# Altium PCB Keypad PCB.PcbDoc
Units mm, origin at the board's own origin, x right, y up, seen from the top; angles counter-clockwise.
Board outline 46.36 x 59 mm, 2 copper layers (Top Layer, Bottom Layer), stack 1.671 mm thick; 9 components, 67 nets, 63 pads, 25 vias.
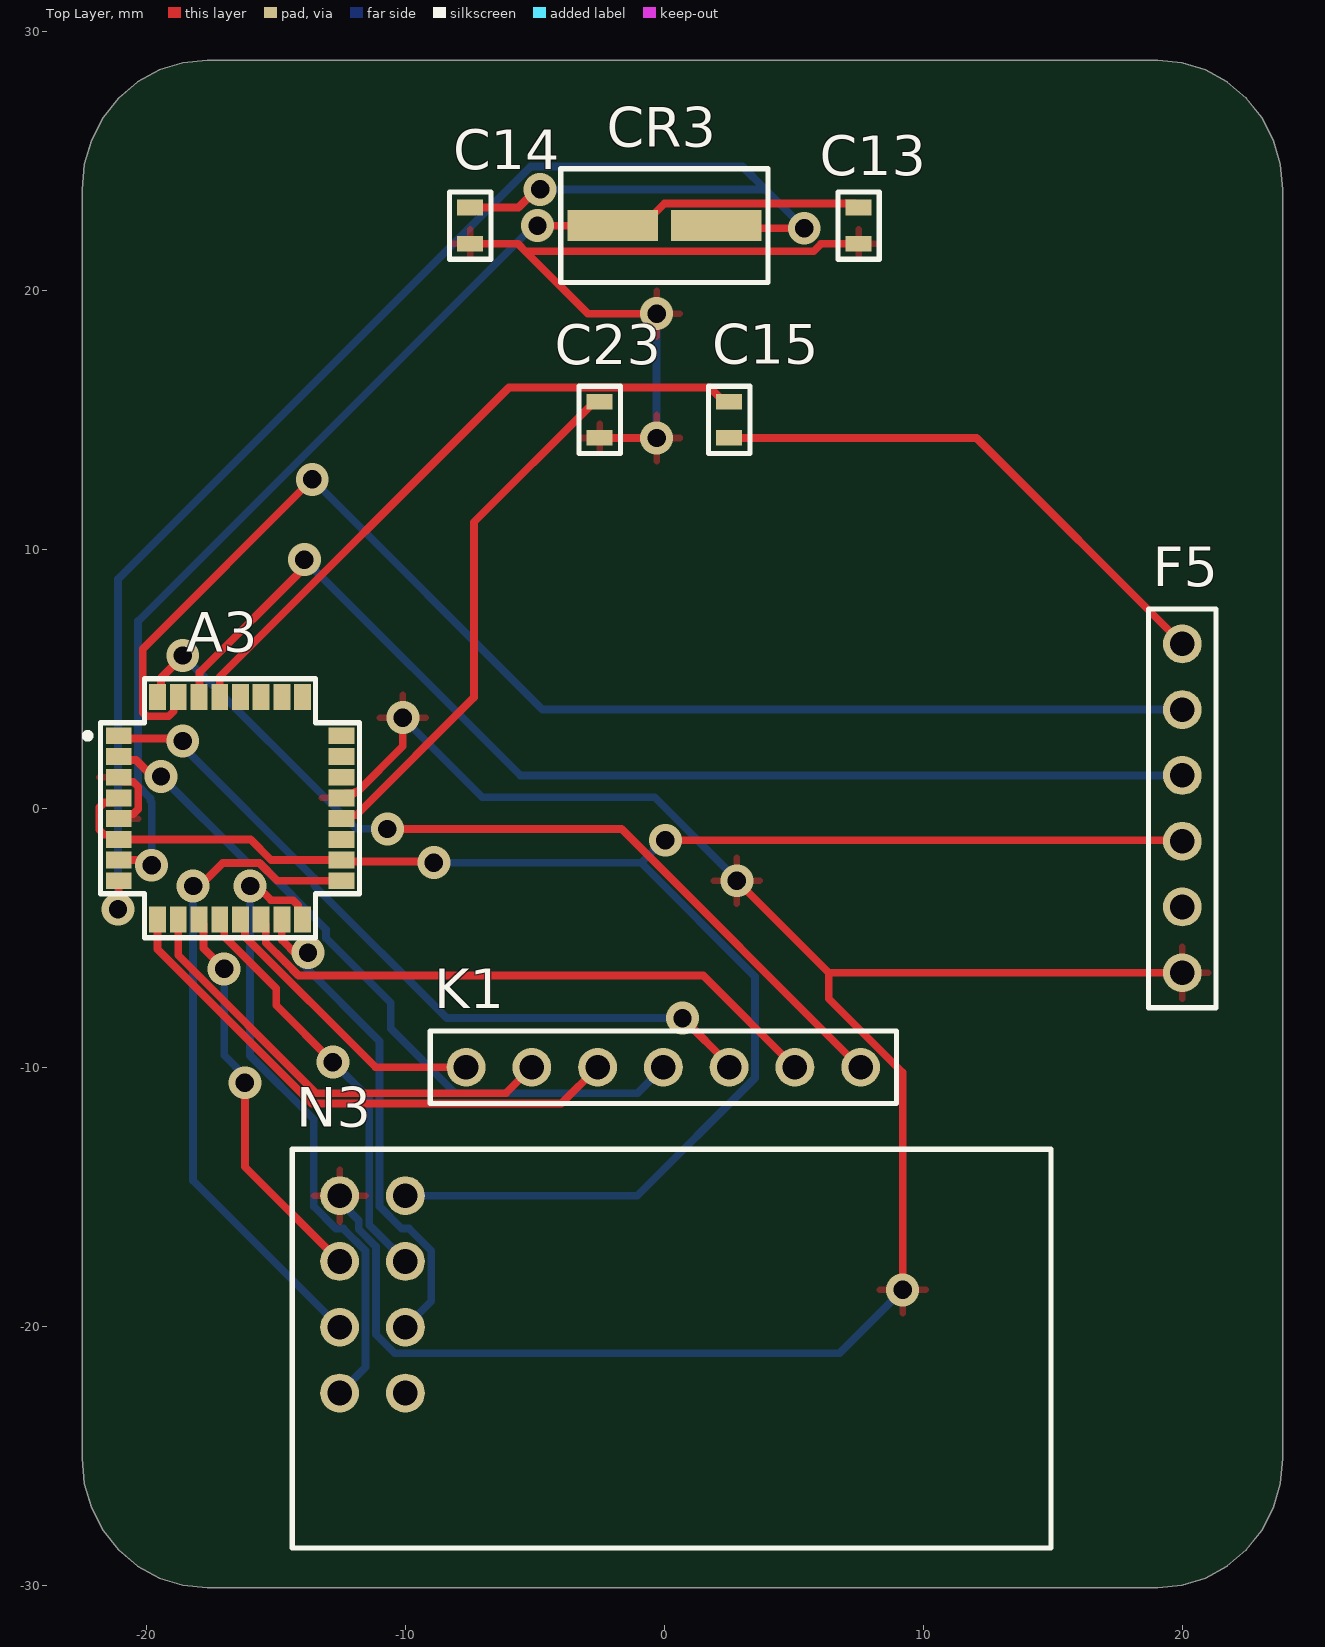
[diagram p0: Top Layer view]
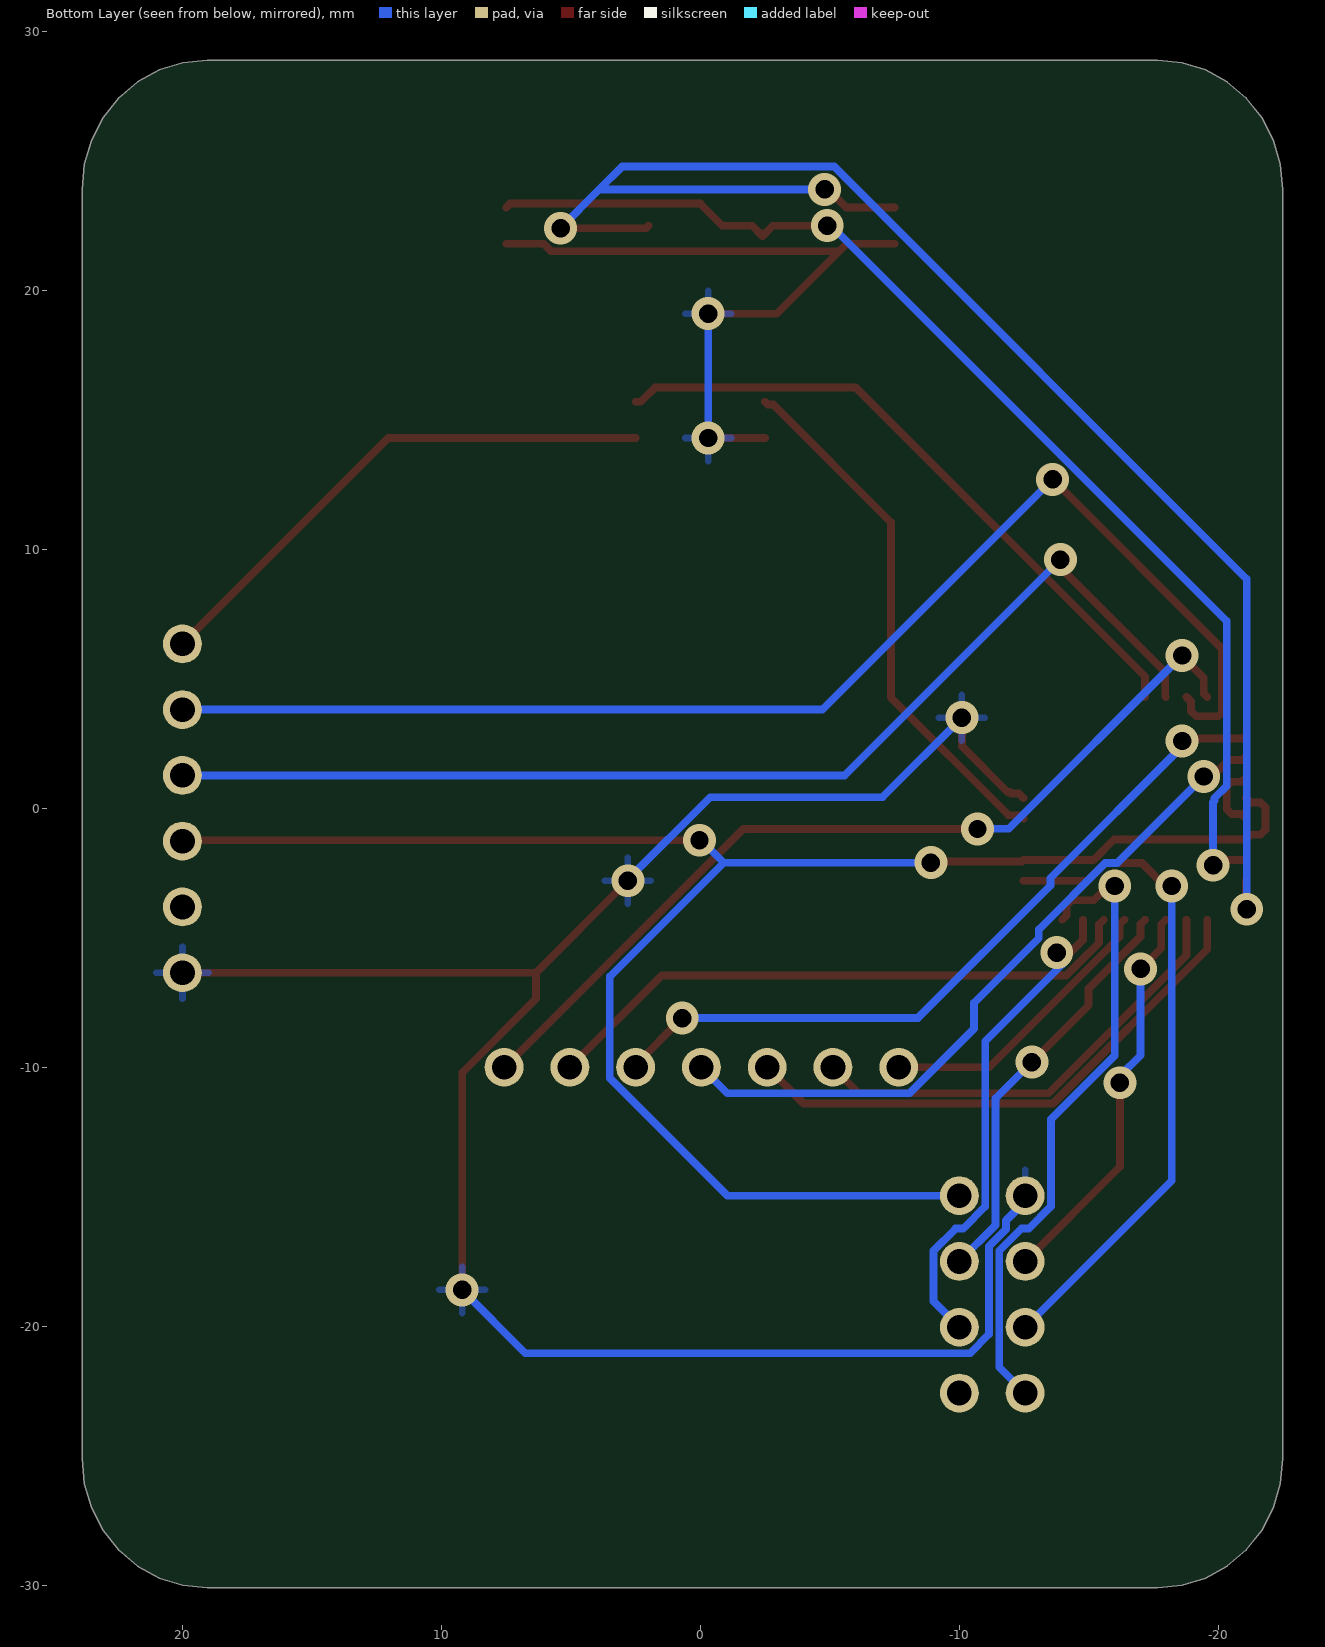
[diagram p1: Bottom Layer view, seen from below]
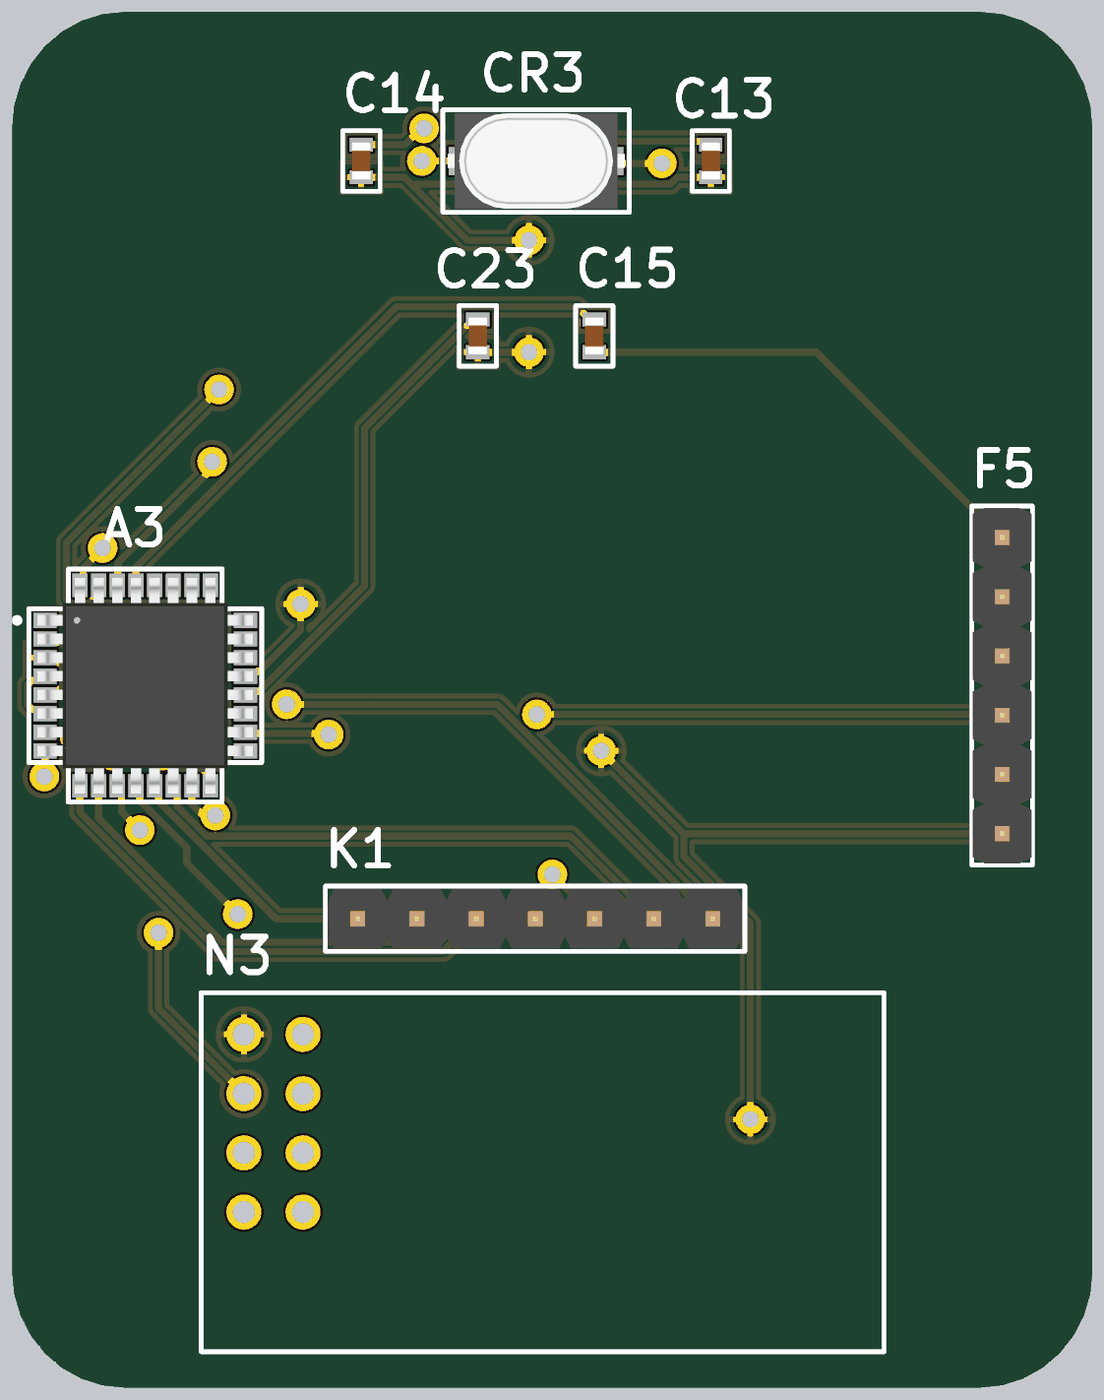
[diagram p2: 3D render of the assembled board from above, using the file's embedded part models]

## Layer stack, top to bottom
Top Solder: solder mask 0.0102, Solder Resist, Dk 3.5
Top Layer: signal copper 0.0356
Dielectric 1: dielectric 1.6, FR-4, Dk 4.8
Bottom Layer: signal copper 0.0356
Bottom Solder: solder mask 0.0102, Solder Resist, Dk 3.5

## Board outline
-21.673,-27.884 -22.12,-27.02 -22.395,-26.082 -22.487,-25.107 -22.487,23.893 -22.395,24.869 -22.12,25.807 -21.673,26.671 -21.073,27.429 -20.341,28.051 -19.506,28.513 -18.6,28.797 -17.658,28.893 19.048,28.893 19.99,28.797 20.896,28.513 21.731,28.051 22.463,27.429 23.063,26.671 23.51,25.807 23.784,24.869 23.877,23.893 23.877,-25.107 23.784,-26.082 23.51,-27.02 23.063,-27.884 22.463,-28.642 21.731,-29.264 20.896,-29.726 19.99,-30.011 19.048,-30.107 -17.658,-30.107 -18.6,-30.011 -19.506,-29.726 -20.341,-29.264 -21.073,-28.642

## Design rules (kind name [scope] priority, off if disabled: settings)
Clearance [All] p1: gap=0.1 ignorepadtopadclearanceinfootprint=FALSE
HoleToHoleClearance [All] p1: gap=0.1 allowstackedmicrovias=TRUE
MinimumSolderMaskSliver [All] p1: minsoldermaskwidth=0.1
PolygonConnect [All] p1: connectstyle=Relief reliefconductorwidth=0.254 reliefentries=4 polygonreliefangle="90 Angle" airgapwidth=0.254
RoutingVias [All] p1: holewidth=0.3 width=0.6 viastyle="Through Hole" minholewidth=0.3 minwidth=0.6 maxholewidth=0.3 maxwidth=0.6
SilkToSilkClearance [All] p1: silktosilkclearance=0.1
SilkToSolderMaskClearance [IsPad] p1: minsilkscreentomaskgap=0 clearancetoexposedcopper=TRUE
SolderMaskExpansion [All] p1: expansion=0.102 istentingtop=FALSE
Width [All] p1: maxlimit=0.4 minlimit=0.1 preferedwidth=0.3
26 further rules are at their usual default settings.

## Components (designator, comment, footprint, x,y, rotation, side; value= is the part's Value field where it differs from the comment)
A3 "Atmega 328P" ATMega328P -16.772,0 r0 top
C13 "22pF" "22pF Capacitor" 7.5,22.5 r90 top
C14 "22pF" "22pF Capacitor" -7.5,22.5 r90 top
C15 "0.1uF" "0.1uF Capacitor" 2.5,15 r90 top
C23 "0.1uF" "0.1uF Capacitor" -2.5,15 r270 top
CR3 "16MHz Crystal" "16MHz Crystal" 0,22.5 r180 top
F5 "FTDI Breakout" FTDI 20,0 r0 top
K1 "3x4 Keypad" "3x4 Keypad" -0.04,-10 r90 top
N3 "NRF24L01" NRF24L01 -11.27,-18.77 r0 top

## Footprints (in the part's own frame and the unit in brackets; to place one, negate y for a bottom-side part, rotate by r counter-clockwise, add the part's x,y. Pads: shape width x height; smd on the part's side, far side on the other; paste and mask are expansions set on the pad)
"0.1uF Capacitor" [mm]
  rect 0.6x1 smd: 1(-0.7,0) 2(0.7,0)
  silkscreen extent -1.3,-0.8 1.3,0.8, body extent -0.8,-0.4 0.8,0.41, height 0.9
"3x4 Keypad" [mm]
  round 1.5 hole 0.95: 1(0,7.62) 2(0,5.08) 3(0,2.54) 4(0,0) 5(0,-2.54) 6(0,-5.08) 7(0,-7.62)
  silkscreen extent -1.4,-9 1.4,9, body extent -1.27,-8.9 1.27,8.88, height 5.55
"16MHz Crystal" [mm]
  rect 3.5x1.2 smd: 1(-2,0) 2(2,0)
  silkscreen extent -4,-2.2 4,2.2, body extent -3.8,-2.05 3.8,2.05, height 2.31
"22pF Capacitor" [mm]
  rect 0.6x1 smd: 1(-0.7,0) 2(0.7,0)
  silkscreen extent -1.3,-0.8 1.3,0.8, body extent -0.8,-0.41 0.8,0.4, height 0.9
ATMega328P [mm]
  rect 1x0.65 smd: 1(-4.3,2.8) 2(-4.3,2) 3(-4.3,1.2) 4(-4.3,0.4) 5(-4.3,-0.4) 6(-4.3,-1.2) 7(-4.3,-2) 8(-4.3,-2.8) 17(4.3,-2.8) 18(4.3,-2) 19(4.3,-1.2) 20(4.3,-0.4) 21(4.3,0.4) 22(4.3,1.2) 23(4.3,2) 24(4.3,2.8)
  rect 0.65x1 smd: 9(-2.8,-4.3) 10(-2,-4.3) 11(-1.2,-4.3) 12(-0.4,-4.3) 13(0.4,-4.3) 14(1.2,-4.3) 15(2,-4.3) 16(2.8,-4.3) 25(2.8,4.3) 26(2,4.3) 27(1.2,4.3) 28(0.4,4.3) 29(-0.4,4.3) 30(-1.2,4.3) 31(-2,4.3) 32(-2.8,4.3)
  silkscreen extent -5.6,-5 5,5, body extent -4.62,-4.62 4.63,4.63, height 1.2
FTDI [mm]
  round 1.5 hole 0.95: 1(0,6.35) 2(0,3.81) 3(0,1.27) 4(0,-1.27) 5(0,-3.81) 6(0,-6.35)
  silkscreen extent -1.3,-7.7 1.3,7.7, body extent -1.27,-7.62 1.27,7.62, height 5.55
NRF24L01 [mm]
  round 1.5 hole 0.95: 1(-1.27,3.81) 2(-1.27,1.27) 3(-1.27,-1.27) 4(-1.27,-3.81) 5(1.27,3.81) 6(1.27,1.27) 7(1.27,-1.27) 8(1.27,-3.81)
  silkscreen extent -3.1,-9.8 26.2,5.6, body extent -2.91,-9.59 26.09,5.41, height 6.21

## Part data
A3: library part ATMEGA328PB-AUR, "IC MCU 8BIT 32KB FLASH 32TQFP", Case/Package=TQFP, Frequency=20MHz, Manufacturer=Microchip, Max Operating Temperature=85°C, Min Operating Temperature=-40°C, Supplier Part Number 1=ATMEGA328PB-AURCT-ND, Category=Microcontrollers, ComponentLink1Description=http://www.microchip.com/mymicrochip/filehandler.aspx?ddocname=en589666&src-supplier=Digi-Key, ComponentLink1URL=http://www.microchip.com/mymicrochip/filehandler.aspx?ddocname=en589666&src-supplier=Digi-Key, Core Architecture=AVR, Interface=I2C,SPI,UART,USART, Manufacturer Part Number=ATMEGA328PB-AUR, Memory Size=32KB, Memory Type=FLASH, Number of I/Os=27, Number of Pins=32, Oscillator Type=Internal, Packaging="Tape and Reel", Peripherals="Brown-out Detect/Reset,POR,PWM,WDT", Pricing 1="1=1.42000, 25=1.30000, 100=1.18000 (USD)", RoHS=No, Stock 1=9971, Supplier 1=Digi-Key
C13 C14: library part 06035A220JAT2A, "Cap Ceramic 22pF 50V C0G 5% SMD 0603 125C Paper T/R", Case Code (Imperial)=0603, Case Code (Metric)=1608, Dielectric=C0G, Dielectric Material=Ceramic, Insulation Resistance=100GR, Manufacturer="Kyocera AVX", Max Operating Temperature=125°C, Min Operating Temperature=-55°C, Package Quantity=1, Supplier Part Number 1=478-1167-1-ND, Temperature Coefficient=30ppm/°C, Tolerance=5%, Voltage=50V, Capacitance=22pF, Case/Package=0603, Category="Ceramic Capacitors", ComponentLink1Description=https://datasheet.ciiva.com/11788/0900766b802d4697-11788031.pdf?src-supplier=RSComponents, ComponentLink1URL=https://datasheet.ciiva.com/11788/0900766b802d4697-11788031.pdf?src-supplier=RSComponents, ComponentLink2Description=https://datasheet.ciiva.com/16351/ccog-16351125.pdf?src-supplier=Future+Electronics, ComponentLink2URL=https://datasheet.ciiva.com/16351/ccog-16351125.pdf?src-supplier=Future+Electronics, ComponentLink3Description=https://datasheet.ciiva.com/1124/759117-1124728.pdf?src-supplier=Element14, ComponentLink3URL=https://datasheet.ciiva.com/1124/759117-1124728.pdf?src-supplier=Element14, ComponentLink4Description=https://datasheet.ciiva.com/7855/759117-7855064.pdf?src-supplier=Element14, ComponentLink4URL=https://datasheet.ciiva.com/7855/759117-7855064.pdf?src-supplier=Element14, ComponentLink5Description=https://datasheet.ciiva.com/150/ccog-150366.pdf?src-supplier=Digi-Key, ComponentLink5URL=https://datasheet.ciiva.com/150/ccog-150366.pdf?src-supplier=Digi-Key, ComponentLink6Description=https://datasheet.ciiva.com/150/ccog-150367.pdf?src-supplier=Digi-Key, ComponentLink6URL=https://datasheet.ciiva.com/150/ccog-150367.pdf?src-supplier=Digi-Key, Contact Plating=Tin,Matte, Depth=0.81mm, Height=0.63mm, Lead Free="Lead Free", Length=1.6mm, Manufacturer Part Number=06035A220JAT2A, Mount="Surface Mount,PCB", Number of Pins=2, Packaging="Tape and Reel", Pricing 1="1=0.10000, 10=0.05600, 50=0.03040, 100=0.02480, 500=0.01772, 1000=0.01392 (USD)", Radiation Hardening=No, REACH SVHC="No SVHC", RoHS=Yes, Stock 1=678111, Supplier 1=Digi-Key, Termination=SMD/SMT, Thickness=0.035inch, Voltage Rating=50V, Voltage Rating (DC)=50V, Width=0.81mm
C15 C23: library part 06033C104KAT4A, "CAP CER 0.1UF 25V X7R 0603", Capacitance=100nF, Case Code (Imperial)=0603, Case Code (Metric)=1608, Dielectric=X7R, Manufacturer="Kyocera AVX", Max Operating Temperature=125°C, Min Operating Temperature=-55°C, Package Quantity=1, Supplier Part Number 1=478-7018-1-ND, Tolerance=10%, Voltage Rating=25V, Case/Package=0603, Category="Ceramic Capacitors", ComponentLink1Description=https://datasheet.ciiva.com/22619/1679506-22619862.pdf?src-supplier=Element14, ComponentLink1URL=https://datasheet.ciiva.com/22619/1679506-22619862.pdf?src-supplier=Element14, ComponentLink2Description=https://datasheet.ciiva.com/28613/1679506-28613035.pdf?src-supplier=Element14, ComponentLink2URL=https://datasheet.ciiva.com/28613/1679506-28613035.pdf?src-supplier=Element14, ComponentLink3Description=https://datasheet.ciiva.com/6277/cx7r-6277758.pdf?src-supplier=Digi-Key, ComponentLink3URL=https://datasheet.ciiva.com/6277/cx7r-6277758.pdf?src-supplier=Digi-Key, ComponentLink4Description=https://datasheet.ciiva.com/6277/cx7r-6277759.pdf?src-supplier=Digi-Key, ComponentLink4URL=https://datasheet.ciiva.com/6277/cx7r-6277759.pdf?src-supplier=Digi-Key, Depth=0.81mm, Height=0.9mm, Lead Free="Lead Free", Length=1.6mm, Manufacturer Part Number=06033C104KAT4A, Mount="Surface Mount", Number of Pins=2, Packaging="Tape and Reel", Pricing 1="1=0.10000, 10=0.04200, 50=0.02320, 100=0.01890, 500=0.01348, 1000=0.01059, 2500=0.00962, 5000=0.00886 (USD)", REACH SVHC="No SVHC", RoHS=Yes, Stock 1=6112957, Supplier 1=Digi-Key, Termination=SMD/SMT, Thickness=0.035inch, Voltage Rating (DC)=25V, Width=0.032inch
CR3: library part ECS-160-20-3X-TR, "CRYSTAL 16.0000MHZ 20PF SMD", ESR (Equivalent Series Resistance)=50R, Frequency=16MHz, Frequency Stability=50ppm, Frequency Tolerance=30ppm, Load Capacitance=20pF, Manufacturer="ECS International", Max Operating Temperature=70°C, Min Operating Temperature=-10°C, Package Quantity=1, Supplier Part Number 1=XC1776CT-ND, Category=Crystals, ComponentLink1Description=https://datasheet.ciiva.com/852/csm-3x-852328.pdf?src-supplier=Digi-Key, ComponentLink1URL=https://datasheet.ciiva.com/852/csm-3x-852328.pdf?src-supplier=Digi-Key, ComponentLink2Description=https://datasheet.ciiva.com/852/csm-3x-852329.pdf?src-supplier=Digi-Key, ComponentLink2URL=https://datasheet.ciiva.com/852/csm-3x-852329.pdf?src-supplier=Digi-Key, ComponentLink3Description=https://datasheet.ciiva.com/852/csm-3x-852330.pdf?src-supplier=Digi-Key, ComponentLink3URL=https://datasheet.ciiva.com/852/csm-3x-852330.pdf?src-supplier=Digi-Key, Height=0.091inch, Lead Free="Lead Free", Length=0.276inch, Manufacturer Part Number=ECS-160-20-3X-TR, Mount="Surface Mount", Packaging="Tape and Reel", Pricing 1="1=0.35000, 10=0.28800, 50=0.25880, 100=0.23000, 500=0.21850, 1000=0.18400 (USD)", RoHS=Yes, Stock 1=6685, Supplier 1=Digi-Key, Termination=SMD/SMT, Tolerance=30ppm, Width=0.161inch
F5: library part FTDI, "FTDI USB to TTL serial converter module"
K1: library part 419, "Membrane 3X4 Matrix Keypad + Extras - 3X4", Manufacturer="Adafruit Industries", Supplier Part Number 1=1528-1136-ND, Category=Uncategorized, ComponentLink1Description=https://media.digikey.com/pdf/Data%20Sheets/Adafruit%20PDFs/419_Web.pdf?src-supplier=Digi-Key, ComponentLink1URL=https://media.digikey.com/pdf/Data%20Sheets/Adafruit%20PDFs/419_Web.pdf?src-supplier=Digi-Key, Illumination Type=Non-Illuminated, Manufacturer Part Number=419, Mount=Panel,Front, Pricing 1="1=3.95000 (USD)", RoHS=Yes, Stock 1=257, Supplier 1=Digi-Key, Termination=Connector
N3: "3.3V NRF24L01 WIRELESS RF MODULE"

## Via types
v1: diameter 1.27, hole 0.711, Top Layer to Bottom Layer, 25 vias

## Nets (pads, with @x,y where several pads share a name; then routed paths per layer and width w, separated by ;. In a path a pad name is that pad's centre, name@x,y a point inside that pad or via, vN(x,y) a via of type N, cw(c..) or ccw(c..) an arc to the next point about the centre after c; other vN are vias at no path point)
2K: 
3.7V: 
100: 
+3V3: A3.4 A3.6 A3.18 F5.4 N3.5 | length 70
  Top Layer w0.3: A3.4 -21.247,0.225 -21.626,0.225 -21.822,0.029 -21.822,-0.829 -21.626,-1.025 -21.247,-1.025 A3.6 -15.983,-1.2 -15.183,-2 A3.18 -12.422,-2.05 -8.95,-2.05 v1(-8.9,-2.1) ; v1(0.035,-1.235) 19.965,-1.235 F5.4
  Bottom Layer w0.3: N3.5 -1.046,-14.96 3.5,-10.414 3.5,-6.5 -0.9,-2.1 ; v1(-8.9,-2.1) -0.9,-2.1 ; v1(0.035,-1.235) -0.035,-1.235 -0.9,-2.1
ADC6: 
ADC7: 
C5: 
C12: A3.29 C15.2 | length 25.3
  Top Layer w0.3: A3.29 -17.172,5.076 -5.998,16.25 1.75,16.25 2.3,15.7 C15.2
C21: 
C24: 
CE: 
GND: A3.3 A3.5 A3.21 C13.1 C14.1 C23.2 F5.6 N3.1 | length 110.5
  Top Layer w0.3: A3.5 -20.897,-0.225 -20.519,-0.225 -20.322,-0.029 -20.322,0.829 -20.519,1.025 -20.897,1.025 A3.3 ; A3.21 -12.297,0.575 -11.997,0.575 -11.947,0.625 -11.869,0.625 -10.1,2.394 v1(-10.1,3.5) ; C14.1 -5.652,21.8 -5.367,21.515 ; C23.2 v1(-0.3,14.3) ; v1(-0.3,19.1) -2.952,19.1 -5.367,21.515 ; v1(2.8,-2.8) 6.35,-6.35 ; C13.1 6.052,21.8 5.767,21.515 -5.367,21.515 ; v1(9.2,-18.6) 9.2,-10.206 6.35,-7.356 6.35,-6.35 ; F5.6 6.35,-6.35
  Bottom Layer w0.3: N3.1 -12.54,-15.177 -11.8,-15.917 -11.8,-16.26 -11.14,-16.92 -11.14,-20.314 -10.414,-21.04 6.76,-21.04 v1(9.2,-18.6) ; v1(-10.1,3.5) -7.029,0.429 -0.377,0.429 2.8,-2.748 v1(2.8,-2.8) ; v1(-0.3,14.3) v1(-0.3,19.1)
NetA1_98: 
NetA2_20: 
NetA3_20: A3.20 C23.1 | length 20.6
  Top Layer w0.3: A3.20 -12.338,-0.265 -11.902,-0.265 -7.356,4.281 -7.356,11.044 -2.81,15.591 -2.609,15.591 C23.1
NetA4_20: 
NetA5_20: 
NetC2_2: 
NetC12_1: 
NetC15_1: C15.1 F5.1 | length 20.8
  Top Layer w0.3: C15.1 12.05,14.3 F5.1
NetC21_1: 
NetC24_1: 
NetC26_1: 
NetF2_2: 
NetG1_1: 
NetG1_2: 
NetO1_8: 
NetQ1_1: 
NetQ2_1: 
NetR4_2: 
NetR5_1: 
NetR5_2: 
OC: 
OD: 
PB0: A3.12 N3.6 | length 16.2
  Top Layer w0.3: A3.12 -16.997,-4.475 -16.997,-4.951 -14.991,-6.957 -14.991,-7.609 v1(-12.8,-9.8)
  Bottom Layer w0.3: v1(-12.8,-9.8) -11.4,-11.2 -11.4,-16.094 -10,-17.494 N3.6
PB1: A3.13 K1.1 | length 11.4
  Top Layer w0.3: A3.13 -16.197,-4.475 -16.197,-4.954 -11.152,-10 K1.1
PB2: A3.14 K1.6 | length 23.4
  Top Layer w0.3: A3.14 -15.397,-4.475 -15.397,-5.189 -14.648,-5.938 -14.13,-6.456 1.496,-6.456 K1.6
PB3: A3.15 N3.7 | length 19.3
  Top Layer w0.3: A3.15 -14.772,-5.082 -14.147,-5.707 -13.899,-5.707 v1(-13.763,-5.571)
  Bottom Layer w0.3: v1(-13.763,-5.571) -13.949,-5.757 -13.949,-6.005 -13.972,-6.028 -11,-9 -11,-15.374 -10.144,-16.23 -9.856,-16.23 -9,-17.086 -9,-19.04 N3.7
PB4: A3.16 N3.4 | length 24.8
  Top Layer w0.3: v1(-16,-3) -15.737,-3 -15.187,-3.55 -14.344,-3.55 -14.147,-3.746 -14.147,-4.125 A3.16
  Bottom Layer w0.3: v1(-16,-3) -16,-9.548 -13.54,-12.008 -13.54,-15.374 -12.684,-16.23 -12.396,-16.23 -11.54,-17.086 -11.54,-21.58 N3.4
PB5: A3.17 N3.3 | length 25.8
  Top Layer w0.3: v1(-18.2,-3) -17.938,-3 -17.053,-2.115 -15.633,-2.115 -14.948,-2.8 A3.17
  Bottom Layer w0.3: v1(-18.2,-3) -18.2,-14.38 N3.3
PB6: A3.7 C13.2 CR3.2 | length 45.9
  Top Layer w0.3: A3.7 -20.1,-2 -19.9,-2.2 v1(-19.8,-2.2) ; v1(-4.9,22.5) -2.8,22.5 -2.4,22.1 CR3.2 -0.85,22.5 0,23.35 7.35,23.35 C13.2
  Bottom Layer w0.3: v1(-19.8,-2.2) -19.8,0.237 -19.85,0.287 -19.85,0.387 -20.324,0.861 -20.324,7.228 -5.052,22.5 v1(-4.9,22.5)
PB7: A3.8 C14.2 CR3.1 | length 63.1
  Top Layer w0.3: v1(-21.1,-3.9) -21.072,-3.872 A3.8 ; C14.2 -5.634,23.2 -4.934,23.9 v1(-4.8,23.9) ; CR3.1 2.1,22.4 v1(5.4,22.4)
  Bottom Layer w0.3: v1(-21.1,-3.9) -21.1,8.852 -5.167,24.785 3.015,24.785 3.9,23.9 ; v1(-4.8,23.9) 3.9,23.9 ; v1(5.4,22.4) 3.9,23.9
PC0: 
PC1: 
PC2: 
PC3: 
PC5: 
PD0: A3.30 F5.3 | length 44.3
  Top Layer w0.3: A3.30 -17.95,4.322 -17.95,5.25 -13.9,9.3 v1(-13.9,9.6)
  Bottom Layer w0.3: v1(-13.9,9.6) -5.57,1.27 F5.3
PD1: A3.31 F5.2 | length 51
  Top Layer w0.3: A3.31 -18.947,4.125 -18.947,3.746 -19.144,3.55 -20.001,3.55 -20.147,3.696 -20.147,6.153 v1(-13.6,12.7)
  Bottom Layer w0.3: v1(-13.6,12.7) -4.71,3.81 F5.2
PD2: A3.32 K1.7 | length 34.8
  Top Layer w0.3: A3.32 -19.438,4.434 -19.438,5.032 -18.6,5.869 v1(-18.6,5.9) ; v1(-10.7,-0.8) -1.652,-0.8 7.548,-10 K1.7
  Bottom Layer w0.3: v1(-18.6,5.9) -11.906,-0.794 -10.706,-0.794 v1(-10.7,-0.8)
PD3: A3.1 K1.5 | length 29.2
  Top Layer w0.3: A3.1 -20.972,2.7 -19.2,2.7 -19.1,2.6 v1(-18.6,2.6) ; v1(0.7,-8.1) K1.5@2.5,-9.9
  Top Layer w0.381: K1.5 K1.5@2.5,-9.9
  Bottom Layer w0.3: v1(-18.6,2.6) -18.6,2.385 -13.515,-2.7 -13.515,-2.985 -8.4,-8.1 v1(0.7,-8.1)
PD4: A3.2 K1.4 | length 27.6
  Top Layer w0.3: A3.2 -20.938,1.866 -20.406,1.866 -19.768,1.228 v1(-19.439,1.228)
  Bottom Layer w0.3: v1(-19.439,1.228) -16.096,-2.115 -15.633,-2.115 -13.064,-4.684 -13.064,-5.019 -10.569,-7.514 -10.569,-8.505 -8.074,-11 -1.04,-11 K1.4
PD5: A3.9 K1.3 | length 21.2
  Top Layer w0.3: A3.9 -19.572,-5.445 -13.617,-11.4 -3.98,-11.4 K1.3
PD6: A3.10 K1.2 | length 17.6
  Top Layer w0.3: A3.10 -18.772,-5.679 -13.452,-11 -6.12,-11 K1.2
PD7: A3.11 N3.2 | length 15.5
  Top Layer w0.3: A3.11 -17.797,-4.475 -17.797,-5.403 v1(-17,-6.2) ; v1(-16.2,-10.6) -16.2,-13.84 N3.2
  Bottom Layer w0.3: v1(-17,-6.2) -17,-9.538 -16.2,-10.338 v1(-16.2,-10.6)
PE0: 
PE1: 
PE4: 
PE5: 
PF0: 
PH4: 
PH5: 
RS: 
S2: 
SW: 
XTAL1: 
XTAL2: 
pads on no net: A3.19 A3.22 A3.23 A3.24 A3.25 A3.26 A3.27 A3.28 F5.5 N3.8

## Polygon pours and split planes (outlines as drawn)
GND on Top Layer "NONET_L-01_P-001" (none, remove dead copper, pour order 0): -22.5,37.7 26.4,37.7 26.4,-37.4 25.3,-38.5 -22.5,-38.5
GND on Bottom Layer "NONET_L-01_P-001" (none, remove dead copper, pour order 1): -22.5,35.6 29.8,35.6 30.2,35.2 30.2,-38.1 -22.4,-38.1 -22.5,-38.2

## Silkscreen, mask and mechanical layers (free items; w line width, h text height)
Board Outline:
  the board outline again, w0.013